# EAGLE board KombyPiRTC (EAGLE 7.2.0)
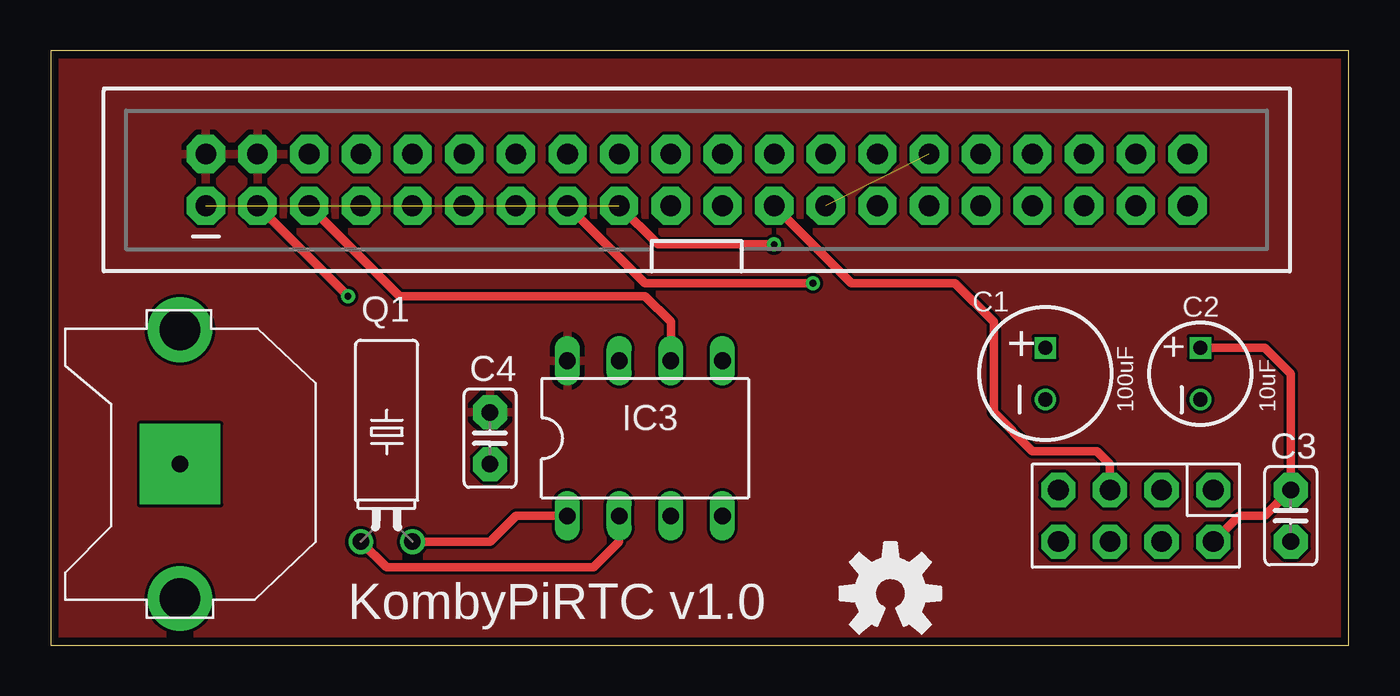
[diagram p0: board, top side]
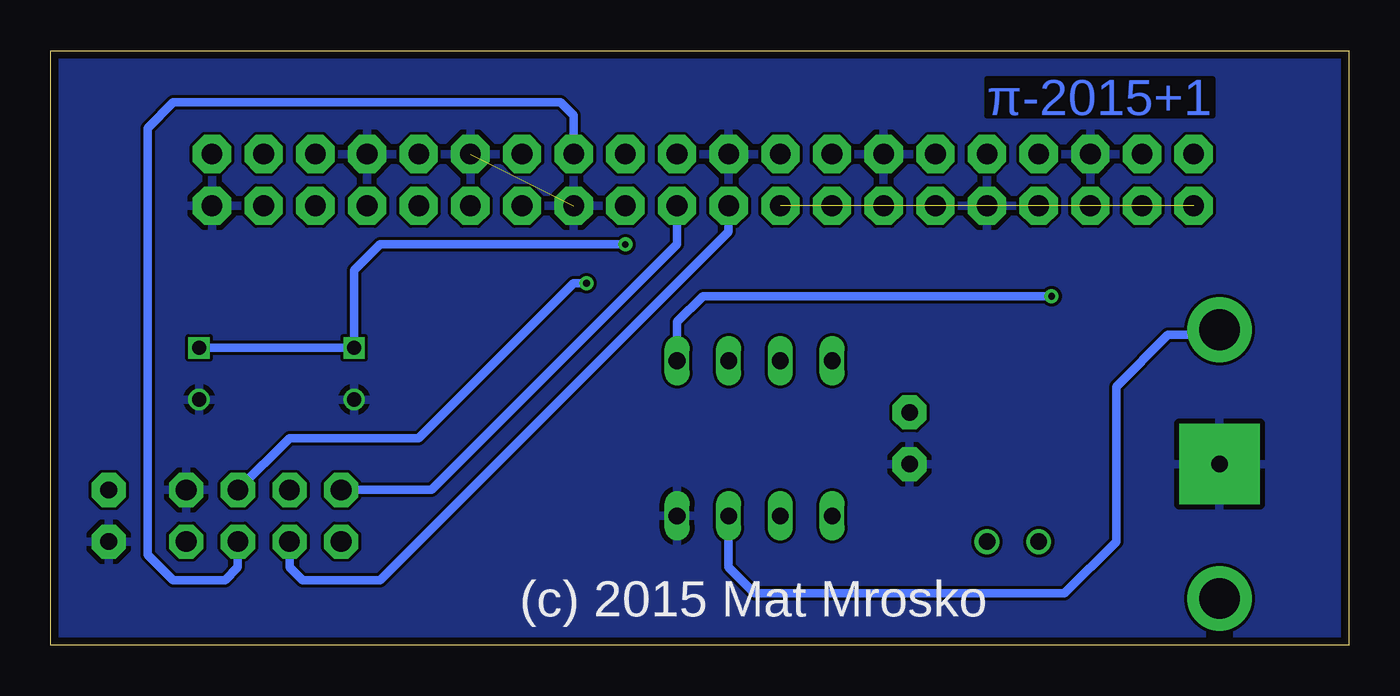
[diagram p1: board, bottom side, seen from below]

Size 63.8 x 29.2 mm. Coordinates in mm from the lower left corner, seen from the top.
Outline: 0,0 63.8,0 63.8,29.2 0,29.2 0,0
Copper layers (1*16): Top 0.0356mm / dielectric 1.5011mm / Bottom 0.0356mm
Design rules "oshpark": minimum track width 6mil, minimum drill 13mil, track to track 6mil, track to pad 6mil, pad to pad 6mil, via to via 6mil, smd to smd 6mil, copper to edge 15mil, drill to drill 6mil, minimum pad ring 7mil, minimum via ring 7mil, stop-mask expansion 4mil, vias tented up to drill 0mil, thermal gap 10mil
Net classes: 1 RFBoard: width 0.406 mm

## Footprints (pad centres in the part's own frame; a part is rotated, then mirrored left to right if it is on the bottom)
CR1220-THM = drill 2 pad 3.175: +1 -6.604,0; +2 6.604,0 | drill 0.8 pad 3.962 square: - 0,0
CPOL-RADIAL-100UF-25V = drill 0.7 square: 1 1.27,0 | drill 0.7: 2 -1.27,0
CPOL-RADIAL-10UF-25V = drill 0.7 square: 1 1.27,0 | drill 0.7: 2 -1.27,0
C025-025X050 = drill 0.813 pad 1.676 octagon: 1 -1.27,0; 2 1.27,0
DIL08 = drill 0.813 long: 1 -3.81,-3.81; 2 -1.27,-3.81; 3 1.27,-3.81; 4 3.81,-3.81; 5 3.81,3.81; 6 1.27,3.81; 7 -1.27,3.81; 8 -3.81,3.81
2X20-SHROUDED = drill 1.016 pad 1.88 octagon: 1 -1.27,24.13; 2 1.27,24.13; 3 -1.27,21.59; 4 1.27,21.59; 5 -1.27,19.05; 6 1.27,19.05; 7 -1.27,16.51; 8 1.27,16.51; 9 -1.27,13.97; 10 1.27,13.97; 11 -1.27,11.43; 12 1.27,11.43; 13 -1.27,8.89; 14 1.27,8.89; 15 -1.27,6.35; 16 1.27,6.35; 17 -1.27,3.81; 18 1.27,3.81; 19 -1.27,1.27; 20 1.27,1.27; 21 -1.27,-1.27; 22 1.27,-1.27; 23 -1.27,-3.81; 24 1.27,-3.81; 25 -1.27,-6.35; 26 1.27,-6.35; 27 -1.27,-8.89; 28 1.27,-8.89; 29 -1.27,-11.43; 30 1.27,-11.43; 31 -1.27,-13.97; 32 1.27,-13.97; 33 -1.27,-16.51; 34 1.27,-16.51; 35 -1.27,-19.05; 36 1.27,-19.05; 37 -1.27,-21.59; 38 1.27,-21.59; 39 -1.27,-24.13; 40 1.27,-24.13
2X04 = drill 1.016 pad 1.676 octagon: 1 -3.81,-1.27; 2 -3.81,1.27; 3 -1.27,-1.27; 4 -1.27,1.27; 5 1.27,-1.27; 6 1.27,1.27; 7 3.81,-1.27; 8 3.81,1.27
TC38H = drill 0.813: 1 -1.27,0; 2 1.27,0

## Placement (x,y rotation side)
BAT  CR1220  [CR1220-THM]  6.35,8.89 90 top
C1  100uF  [CPOL-RADIAL-100UF-25V]  48.9,13.34 90 top
C2  10uF  [CPOL-RADIAL-10UF-25V]  56.52,13.34 90 top
C3  0.1uF  [C025-025X050]  60.96,6.35 270 top
C4  0.1uF  [C025-025X050]  21.59,10.16 270 top
IC3  DS1307  [DIL08]  29.21,10.16 0 top
JP1  RASPBERRYPI-B+-GPIO  [2X20-SHROUDED]  31.75,22.86 90 top
JP2  nRF24L01  [2X04]  53.34,6.35 180 top
Q1  32.768  [TC38H]  16.51,5.08 0 top
U$3  [OSHW-LOGO-M]  41.27,2.54 0 top

## Library data of the parts
BAT C3 C4 IC3 = adafruit
C1 C2 = SparkFun
JP1 = SparkFun-Boards
JP2 = Materdaddy-Custom
Q1 = crystal
U$3 = SparkFun-Aesthetics

## Nets
3.3V [RFBoard]: C1.1 C2.1 C3.1 JP1.1 JP1.17 JP2.2
CE1 [RFBoard]: JP1.26 JP2.4
GND: BAT.- C1.2 C2.2 C3.2 C4.2 IC3.4 JP1.6 JP1.9 JP1.14 JP1.20 JP1.25 JP1.30 JP1.34 JP1.39 JP2.1
MISO [RFBoard]: JP1.21 JP2.7
MOSI [RFBoard]: JP1.19 JP2.6
N$14: IC3.1 Q1.2
N$15: IC3.2 Q1.1
N$39: BAT.+2 IC3.3
RF_CE [RFBoard]: JP1.15 JP2.3
SCL: IC3.6 JP1.5
SCLK: JP1.23 JP2.5
SDA: IC3.5 JP1.3
SQW: IC3.7
VCC: C4.1 IC3.8 JP1.2 JP1.4

## Tracks (layer width: path | path; a pad name or v marks a point on that pad's centre or on a via)
3.3V  (via drill 0.33)  (1 unrouted)
  Top 0.406: JP1.17 29.84,19.68 v35.56,19.68 | JP2.2 58.42,6.35 59.69,6.35 C3.1 60.96,13.34 59.69,14.61 C2.1
  Bottom 0.406: v35.56,19.68 47.62,19.68 48.9,18.41 C1.1 C2.1
CE1
  Bottom 0.406: JP1.26 38.1,26.04 38.73,26.67 57.78,26.67 59.05,25.4 59.05,4.45 57.78,3.17 55.24,3.17 54.61,3.81 JP2.4
GND  (1 unrouted)
  pour Bottom: 0,29.21 0,0 64.14,0 64.14,29.21
MISO
  Bottom 0.406: JP1.21 33.02,19.68 45.09,7.62 JP2.7
MOSI
  Bottom 0.406: JP2.6 52.07,3.81 51.44,3.17 47.62,3.17 30.48,20.32 JP1.19
N$14
  Top 0.406: IC3.1 22.86,6.35 21.59,5.08 Q1.2
N$15
  Top 0.406: IC3.2 27.94,5.08 26.67,3.81 16.51,3.81 Q1.1
N$39
  Bottom 0.406: IC3.3 30.48,3.81 29.21,2.54 13.97,2.54 11.43,5.08 11.43,12.7 8.89,15.24 6.6,15.24 BAT.+2
RF_CE  (via drill 0.33)
  Top 0.406: v37.47,17.78 29.21,17.78 JP1.15
  Bottom 0.406: JP2.3 52.07,10.16 45.72,10.16 38.1,17.78 v37.47,17.78
SCL
  Top 0.406: JP1.5 17.14,17.14 29.21,17.14 30.48,15.88 IC3.6
SCLK
  Top 0.406: JP1.23 39.37,17.78 44.45,17.78 46.35,15.88 46.35,11.43 48.26,9.53 51.44,9.53 52.07,8.89 JP2.5
SDA  (via drill 0.33)
  Top 0.406: JP1.3 v14.61,17.14
  Bottom 0.406: v14.61,17.14 31.75,17.14 33.02,15.88 IC3.5
VCC
  pour Top: 0,29.21 0,0 64.14,0 64.14,29.21

## Text on the board
Bottom: π-2015+1
tNames: + | + | KombyPiRTC v1.0
bNames: (c) 2015 Mat Mrosko